# EAGLE board JouleThiefLamp (EAGLE 6.5.0)
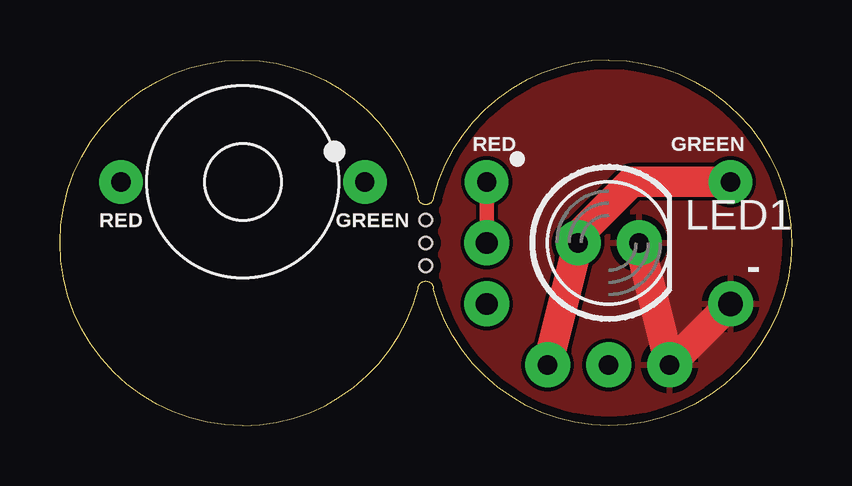
[diagram p0: board, top side]
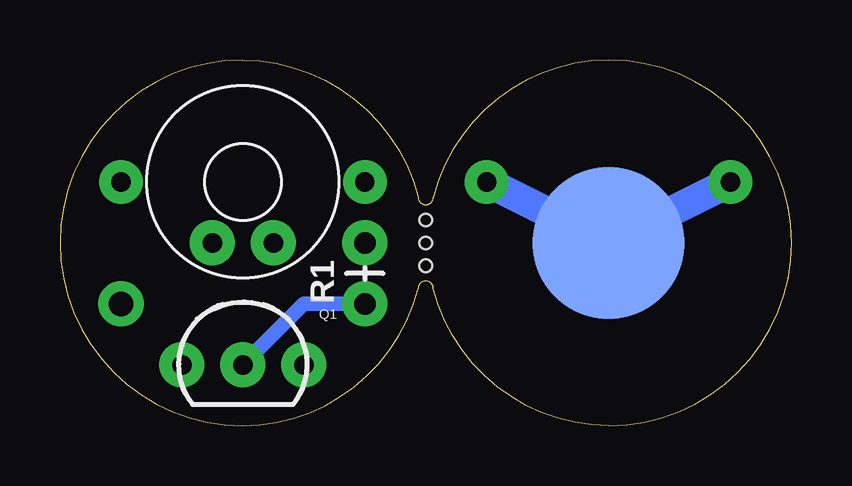
[diagram p1: board, bottom side, seen from below]

Size 30.48 x 15.24 mm. Coordinates in mm from the lower left corner, seen from the top.
Outline: 22.86,15.24 arc-180 22.86,0 arc-75 15.56,5.71 arc180 14.92,5.71 arc-75 7.62,0 arc-180 7.62,15.24 arc-75 14.92,9.53 arc180 15.56,9.53 arc-75 22.86,15.24
Copper layers (1*16): Top 0.0356mm / dielectric 1.5011mm / Bottom 0.0356mm
Design rules "LaenPCBOrder": minimum track width 6mil, minimum drill 13mil, track to track 6mil, track to pad 6mil, pad to pad 6mil, via to via 6mil, smd to smd 6mil, copper to edge 15mil, drill to drill 6mil, minimum pad ring 7mil, minimum via ring 7mil, stop-mask expansion 3mil, vias tented up to drill 0mil, thermal gap 10mil
Holes 0.51 mm at 15.24,7.62 15.24,6.67 15.24,8.57

## Footprints (pad centres in the part's own frame; a part is rotated, then mirrored left to right if it is on the bottom)
1X01NS = drill 1.016 pad 1.88: 1 0,0
LED5MM = drill 0.813 pad 1.88: A -1.27,0; K 1.27,0
TO-92-AMMO = drill 0.813 pad 1.88: 1 -2.54,0; 2 0,0; 3 2.54,0
AXIAL-0.1 = drill 0.9 pad 1.88: P$1 0,0; P$2 2.54,0
AA+ = smd 6.35 x 6.35: BATT+ 0,0
HALF_CHOKE = drill 0.8 pad 1.814: CENTER -5.08,0; OUTSIDE 5.08,0

## Placement (x,y rotation side)
JP1  M01SMDNS  [1X01NS]  27.94,5.08 0 top
LED1  [LED5MM]  22.86,7.62 0 top
Q1  [TO-92-AMMO]  22.86,2.54 0 bottom
R1  [AXIAL-0.1]  17.78,5.08 90 bottom
U$1  AA+BATT  [AA+]  7.62,7.62 0 bottom
U$2  HALF_CHOKE  [HALF_CHOKE]  7.62,10.16 180 top
U$3  HALF_CHOKE  [HALF_CHOKE]  22.86,10.16 0 bottom

## Library data of the parts
JP1 = SparkFun-Connectors
LED1 = SparkFun-LED
Q1 = SparkFun-DiscreteSemi
R1 = SparkFun-Resistors
U$1-U$3 = barbary_enterprises

## Nets
-: JP1.1 LED1.K Q1.1
N$1: R1.P$2 U$3.OUTSIDE
N$3: LED1.A Q1.3 U$3.CENTER
N$5: Q1.2 R1.P$1
V_BATT: U$1.BATT+ U$2.CENTER U$2.OUTSIDE

## Tracks (layer width: path | path; a pad name or v marks a point on that pad's centre or on a via)
-
  Top 1.27: LED1.K Q1.1 JP1.1
  pour Top: 15.24,15.24 30.48,15.24 30.48,0.64 arc-90 29.84,0 15.24,0
N$1
  Top 0.61: U$3.OUTSIDE R1.P$2
N$3
  Top 1.27: U$3.CENTER 23.81,10.16 21.78,8.12 arc45 21.59,7.67 LED1.A Q1.3
N$5
  Bottom 0.61: R1.P$1 20.32,5.08 Q1.2
V_BATT
  Bottom 1.27: U$2.CENTER U$1.BATT+ U$2.OUTSIDE

## Text on the board
tPlace: RED | GREEN | RED | GREEN | -